# Allegro board 2512460.brd
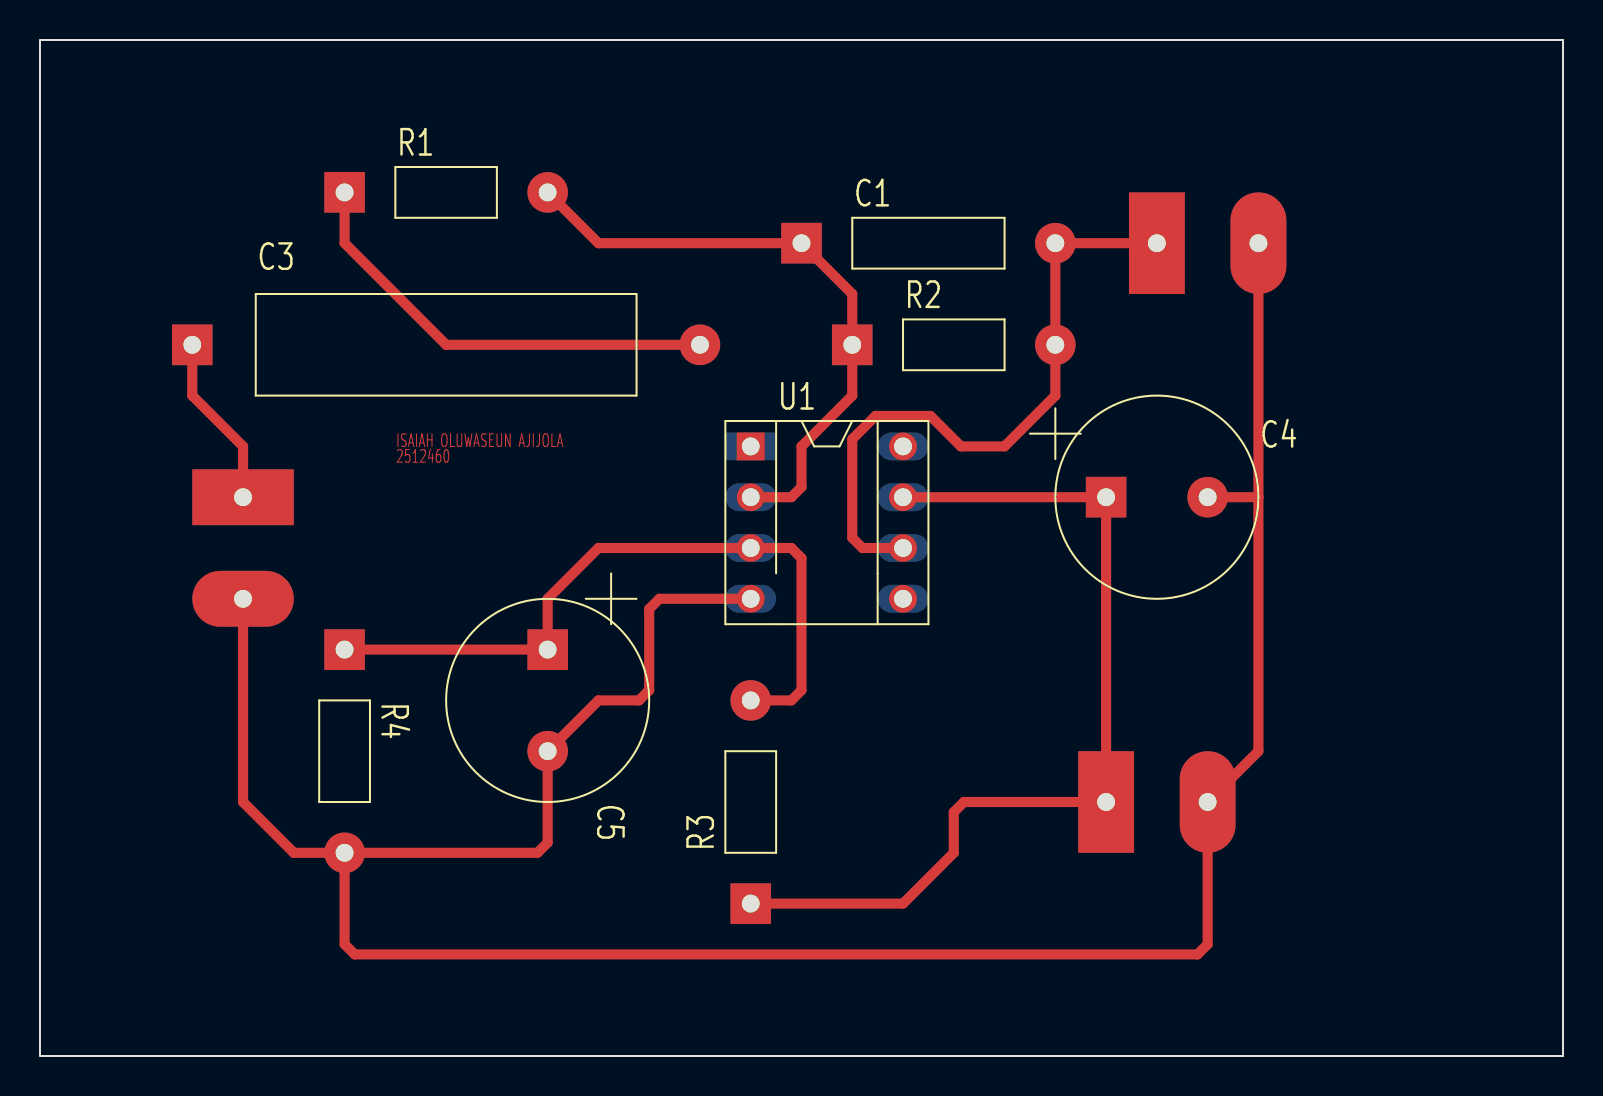
[diagram p0: board, top side]
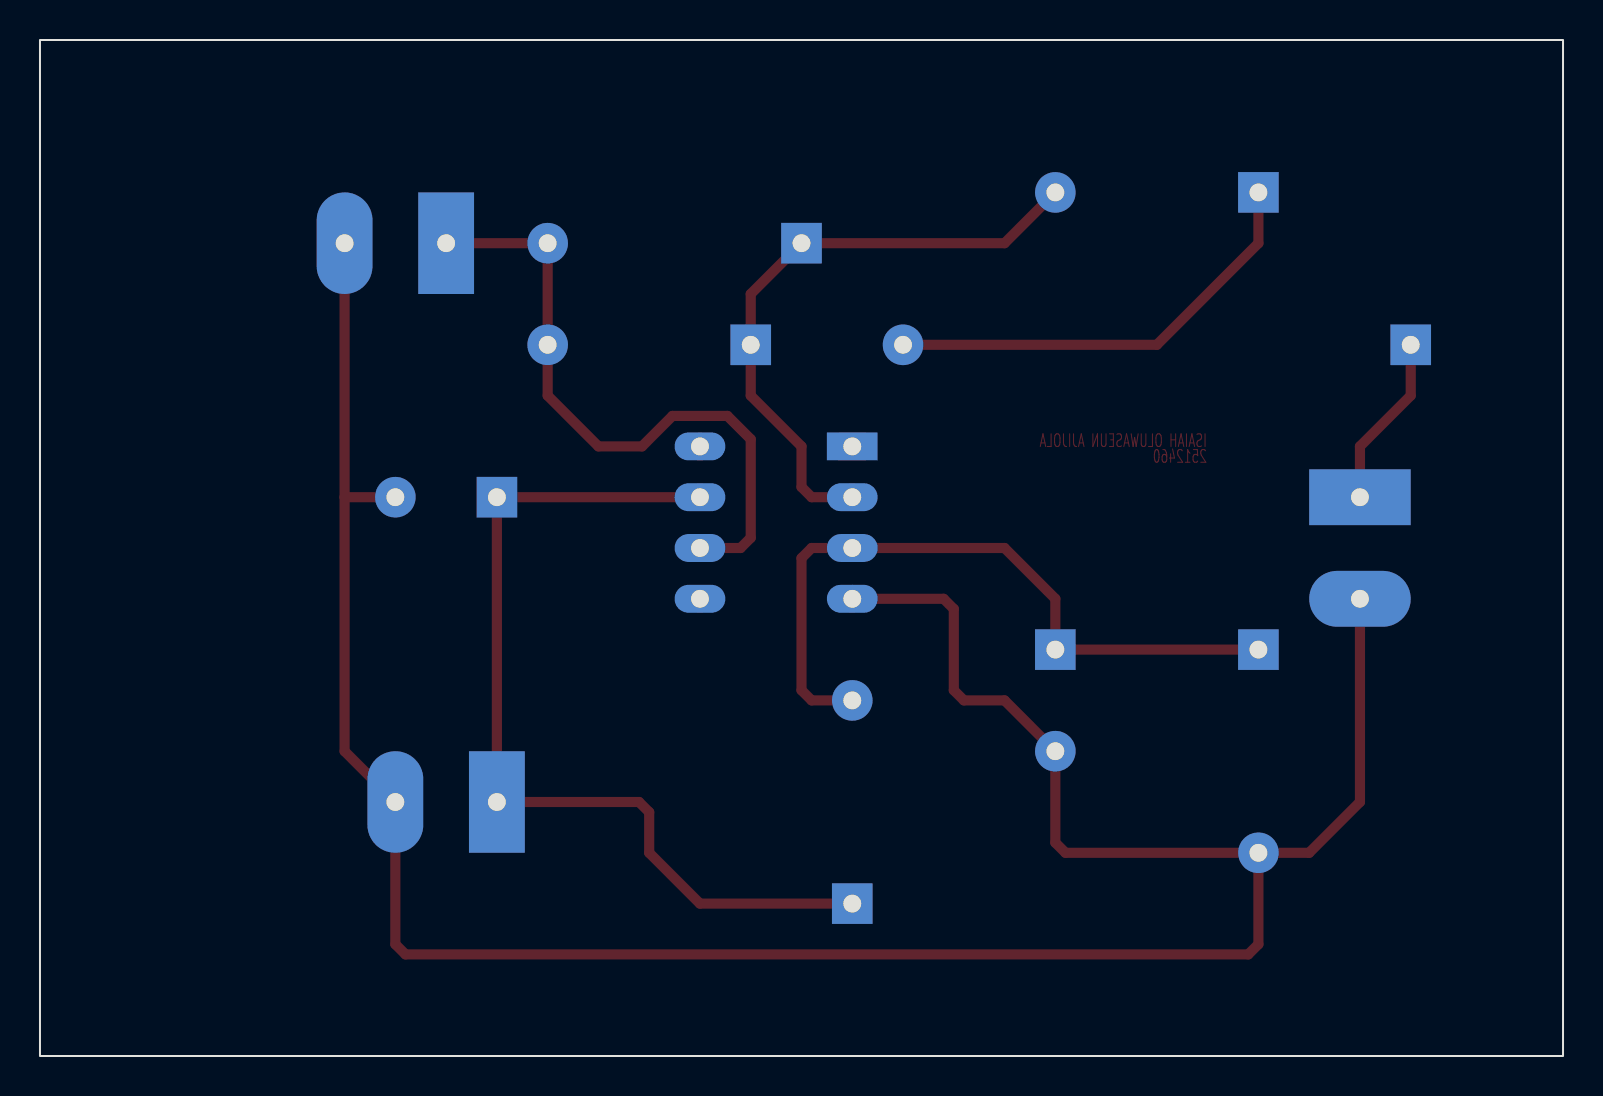
[diagram p1: board, bottom side, seen from below]

Outline 76.2 x 50.8 mm; copper layers: TOP, BOTTOM. Coordinates in mm from the lower left corner of the outline.
Outline path: rectangle 0,0 76.2,50.8

## Design rules (mm)
constraint set DEFAULT: min track width 0.508

## Placement (name value [footprint] x y rotation side)
C1  10n  [GU-RC500]  38.1 40.64 0 top
C3  1u  [GU-RC1000]  7.62 35.56 0 top
C4  4u7  [GU-CAPCYL200]  53.34 27.94 0 top
C5  4u7  [GU-CAPCYL200]  25.4 20.32 270 top
J1  CON2  [GU-TERMINAL2-200]  10.16 27.94 0 top
J2  CON2  [GU-TERMINAL2-200]  55.88 40.64 90 top
J3  CON2  [GU-TERMINAL2-200]  53.34 12.7 90 top
R1  330k  [GU-RC400]  15.24 43.18 0 top
R2  2000k  [GU-RC400]  40.64 35.56 0 top
R3  1k  [GU-RC400]  35.56 7.62 90 top
R4  1k  [GU-RC400]  15.24 20.32 270 top
U1  MCP6291  [GU-DIPSOCK8]  35.56 30.48 0 top

## Library data of the parts
C1 = CAP NP 10n
C3 = CAP NP 1u
C4 C5 = CAP POL 4u7
J1-J3 = CON2: User Part Number: TERMINAL2-200
R1 = Resistor 330k
R2 = Resistor 2000k
R3 R4 = Resistor 1k
U1 = MCP6291

## Footprints (pads in the part's own frame, mm; a bottom-side part is the same pattern mirrored in y, then rotated)
GU-CAPCYL200
  rect 2.032x2.032 hole 0.889: 1(0,0)
  round 2.032 hole 0.889: 2(5.08,0)
GU-DIPSOCK8
  rect 1.397x1.397 hole 0.889: 1(0,0)
  round 1.397 hole 0.889: 2(0,-2.54) 3(0,-5.08) 4(0,-7.62) 5(7.62,-7.62) 6(7.62,-5.08) 7(7.62,-2.54) 8(7.62,0)
GU-RC400
  rect 2.032x2.032 hole 0.889: 1(0,0)
  round 2.032 hole 0.889: 2(10.16,0)
GU-RC500
  rect 2.032x2.032 hole 0.889: 1(0,0)
  round 2.032 hole 0.889: 2(12.7,0)
GU-RC1000
  rect 2.032x2.032 hole 0.889: 1(0,0)
  round 2.032 hole 0.889: 2(25.4,0)
GU-TERMINAL2-200
  rect 5.08x2.794 hole 0.889: 1(0,0)
  oval 5.08x2.794 hole 0.889: 2(0,-5.08)

## Nets
GND: C4.2 C5.2 J1.2 J2.2 J3.2 R4.2 U1.4
VCC_BAR: C4.1 J3.1 R3.1 U1.7(VCC)
OUTPUT: C1.2 J2.1 R2.2 U1.6
VREF: C5.1 R3.2 R4.1 U1.3
N02097: C3.1 J1.1
N02115: C3.2 R1.1
N02190: C1.1 R1.2 R2.1 U1.2

Pads without a net: U1 1 5 8

## Routing (per net, layer and track width the routed paths; a pad name or vN(x,y) marks a point on that pad's centre or on a via; arc(x,y) is an arc through that point)
GND: length 133.7
  TOP w0.508: C4.2 60.96,27.94 ; 60.96,27.94 60.96,15.24 J3.2 58.42,5.59 57.91,5.08 15.75,5.08 15.24,5.59 R4.2 ; 60.96,27.94 J2.2 ; R4.2 12.7,10.16 10.16,12.7 J1.2 ; R4.2 24.89,10.16 25.4,10.67 C5.2 27.94,17.78 29.97,17.78 30.48,18.29 30.48,22.35 30.99,22.86 U1.4
VCC_BAR: length 46.5
  TOP w0.508: R3.1 43.18,7.62 45.72,10.16 45.72,12.19 46.23,12.7 J3.1 C4.1 U1.7
OUTPUT: length 32.7
  TOP w0.508: J2.1 C1.2 R2.2 50.8,33.02 48.26,30.48 46.08,30.48 44.56,32 41.8,32 40.64,30.84 40.64,25.91 41.15,25.4 U1.6
VREF: length 36
  TOP w0.508: R4.1 C5.1 25.4,22.86 27.94,25.4 U1.3 37.59,25.4 38.1,24.89 38.1,18.29 37.59,17.78 R3.2
N02097: length 8.7
  TOP w0.508: J1.1 10.16,30.48 7.62,33.02 C3.1
N02115: length 22.4
  TOP w0.508: R1.1 15.24,40.64 20.32,35.56 C3.2
N02190: length 30.8
  TOP w0.508: R1.2 27.94,40.64 C1.1 40.64,38.1 R2.1 40.64,33.02 38.1,30.48 38.1,28.45 37.59,27.94 U1.2

## Text on the board
TOP: ISAIAH OLUWASEUN AJIJOLA | 2512460
